# Altium PCB PCB1.PcbDoc
Units mil, origin at the board's own origin, x right, y up, seen from the top; angles counter-clockwise.
Board outline 2755.91 x 2755.91 mil, 2 copper layers (Top Layer, Bottom Layer); 53 components, 58 nets, 251 pads, 55 vias.
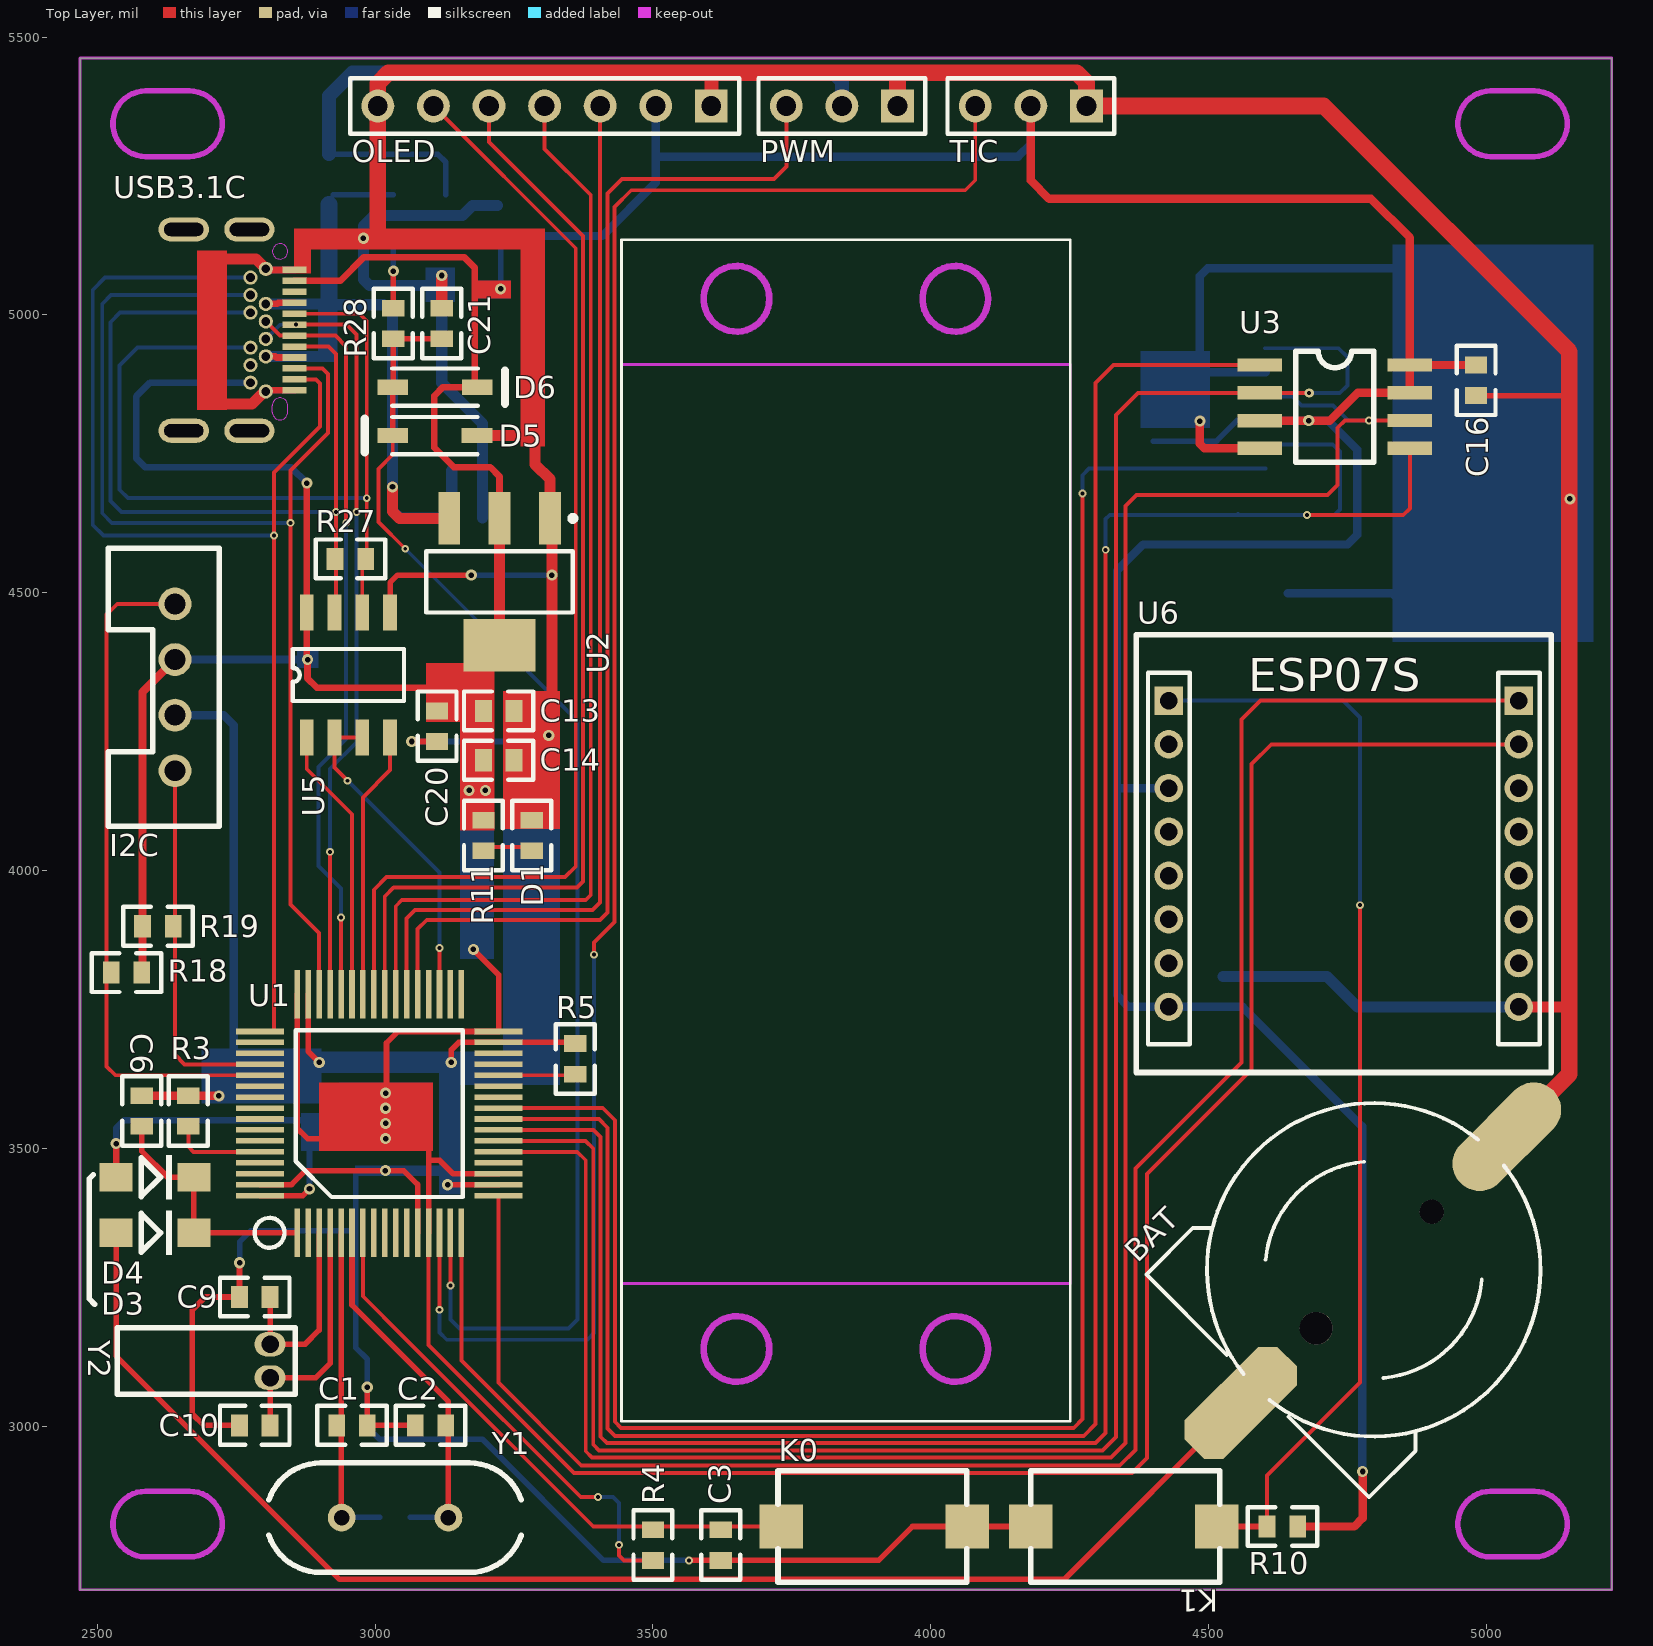
[diagram p0: Top Layer view]
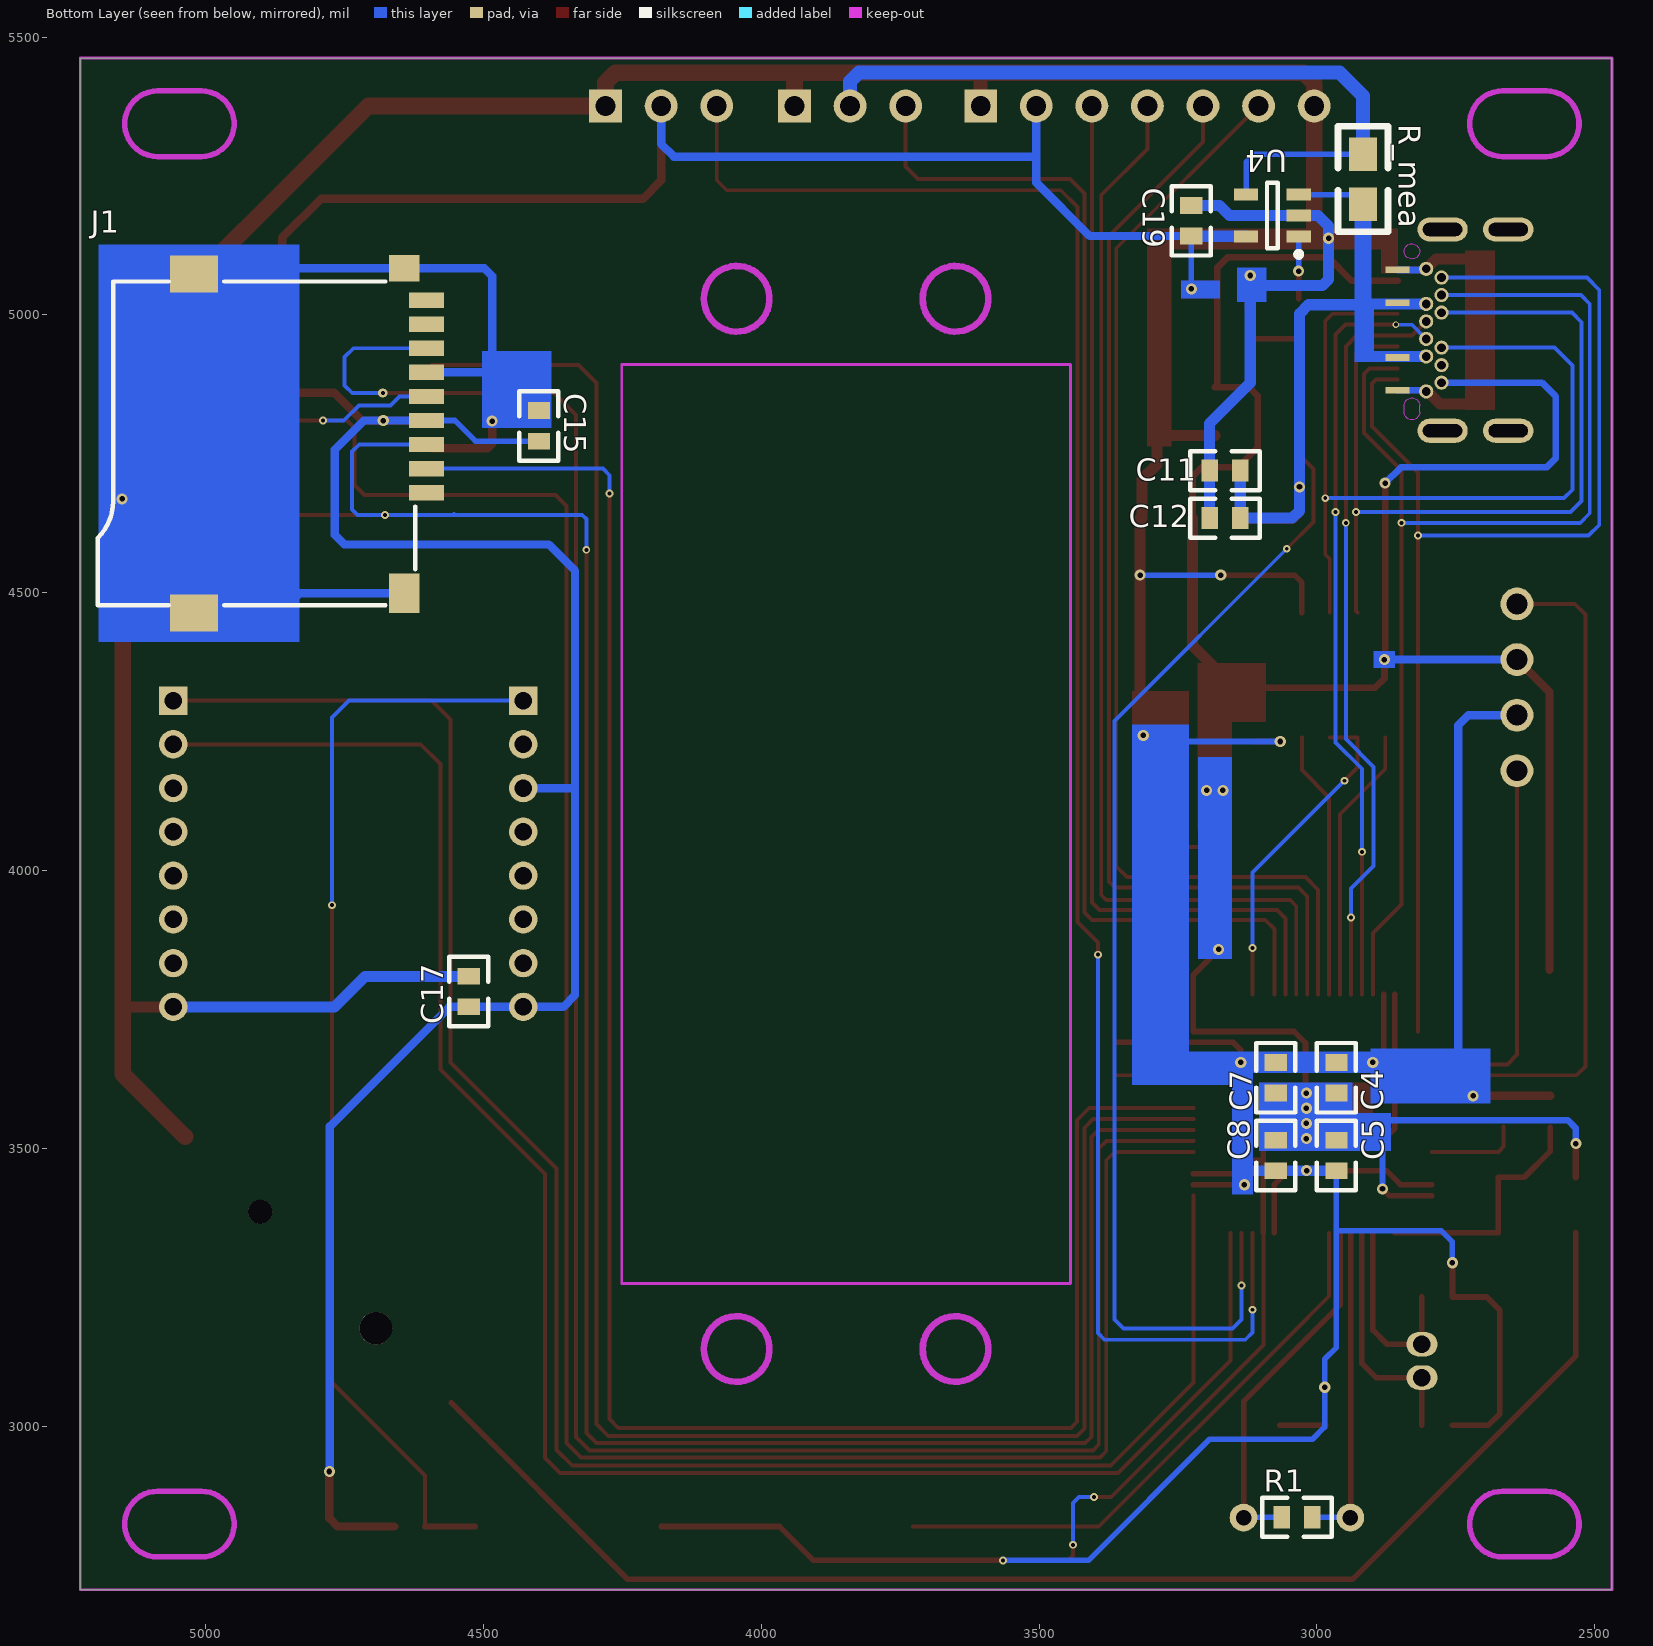
[diagram p1: Bottom Layer view, seen from below]

## Layer stack, top to bottom
Top Layer: signal copper 1.4
Dielectric: dielectric 12.6, FR-4, Dk 4.8
Bottom Layer: signal copper 1.4

## Board outline
2469.21,2706.32 2469.21,5462.23 5225.12,5462.23 5225.12,2706.32

## Design rules (kind name [scope] priority, off if disabled: settings)
Clearance [All] p1: gap=5.9
ComponentClearance [All] p1: gap=0 collisioncheckmode=3 verticalgap=0 showdistances=FALSE
HoleToHoleClearance [All] p1: gap=0 allowstackedmicrovias=TRUE
MinimumSolderMaskSliver [All] p1: minsoldermaskwidth=0
PolygonConnect [All] p1: connectstyle=Relief reliefconductorwidth=10 reliefentries=4 polygonreliefangle="90 Angle"
RoutingVias [All] p1: holewidth=10 width=20 viastyle="Through Hole" minholewidth=6 minwidth=6 maxholewidth=30 maxwidth=50
SilkToSilkClearance [All] p1: silktosilkclearance=0
SilkscreenOverComponentPads [All] p1: minsilkscreentomaskgap=0
SolderMaskExpansion [All] p1: expansion=4
TestPointUsage [All] p1: valid=0 allowmultiple=FALSE
Testpoint [All] p1: side=15 testpointundercomponent=TRUE minsize=40 maxsize=100 preferedsize=60 minholesize=0 maxholesize=40 preferedholesize=32 testpointgrid=1 style=1023 order=0123456789
Width [All] p1: maxlimit=100 minlimit=1 preferedwidth=10
19 further rules are at their usual default settings.

## Components (designator, comment, footprint, x,y, rotation, side; value= is the part's Value field where it differs from the comment)
BAT "CR1220" BATM 4797,3282 r315 top
C1 "Cap" 0603 2986,3002 r180 top
C2 "Cap" 0603 3127,3002 r180 top
C3 "Cap" 0603 3621.8,2759 r90 top
C4 "Cap" 0603 2965,3600 r90 bottom
C5 "Cap" 0603 2965,3515 r270 bottom
C6 "Cap" 0603 2580,3540 r90 top
C7 "Cap" 0603 3074,3600 r90 bottom
C8 "Cap" 0603 3074,3515 r270 bottom
C9 "Cap" 0603 2811,3233 r180 top
C10 "Cap" 0603 2756,3002 r0 top
C11 "Cap" 0603 3193,4720 r180 bottom
C12 "Cap" 0603 3193,4634.5 r180 bottom
C13 "Cap" 0603 3250,4287.5 r180 top
C14 "Cap" 0603 3250,4199 r180 top
C15 "Cap" 0603 4400,4828 r270 bottom
C16 "Cap" 0603 4981,4855 r90 top
C17 "Cap" 0603 4526,3810 r270 bottom
C19 "Cap" 0603 3226,5197 r270 bottom
C20 "Cap" 0603 3111.5,4232.5 r90 top
C21 "Cap" 0603 3120,4957 r90 top
D1 "LED2" 0603 3282,4036 r90 top
D3 "1N4148" DIODE_SOP 2534,3348.5 r0 top
D4 "1N4148" DIODE_SOP 2534,3448.5 r0 top
D5 "SS14" IN5819 3107.55,4783 r180 top
D6 "SS14" IN5819 3107.8,4870.2 r0 top
I2C "Header 4" 4P 2640,4480 r270 top
J1 "SDCARD-M" SDCARD-M 5036,4768.8 r0 bottom
K0 "K1" sop2 4085,2820 r180 top
K1 "K3" sop2 4160,2820 r0 top
OLED "Header 7" HDR1X7 3605,5376 r180 top
PWM "Header 3" HDR1X3 3940,5376 r180 top
R1 "Res2" 0603 3063.5,2836.5 r180 bottom
R3 "Res2" 0603 2664,3540 r90 top
R4 "Res2" 0603 3500,2759 r90 top
R5 "Res2" 0603 3360,3689 r270 top
R10 "Res2" 0603 4660,2820 r180 top
R11 "Res2" 0603 3195,4036 r90 top
R18 "Res2" 0603 2580,3816.8 r180 top
R19 "Res2" 0603 2636.6,3900 r180 top
R27 "Res2" 0603 2928,4561 r0 top
R28 "Res2" 0603 3032.8,4957 r90 top
R_mea "Res2" 0805 2917,5289.5 r270 bottom
TIC "Header 3" HDR1X3 4280,5376 r180 top
U1 "STM32F103RCT6" LQFP64 2860,3348.5 r90 top
U2 "LM1117" MP04A_N 3224,4520 r270 top
U3 "W25Q64" SOIC-8 4592,4910 r0 top
U4 "ina194" ina194 3080,5179 r0 bottom
U5 "SP3485" SOP-8 2877,4240 r90 top
U6 "esp07s" ESP07S 4496,3333 r0 top
USB3.1C "USB3.1 TYPEC" "MicroUSB TypeC 3.1 - duplicate" 2829,5081 r270 top
Y1 "8MHz" XTAL_US 3132,2836 r180 top
Y2 "32.768k" XTAL32768 2811,3148 r270 top

## Footprints (in the part's own frame and the unit in brackets; to place one, negate y for a bottom-side part, rotate by r counter-clockwise, add the part's x,y. Pads: shape width x height; smd on the part's side, far side on the other; paste and mask are expansions set on the pad)
4P [mm]
  round 1.5 hole 0.95: 1(0,0) 2(2.54,0) 3(5.08,0) 4(7.62,0)
  silkscreen extent -2.54,-3.05 10.16,2.03
0603 [mil]
  rect 30x40 smd: 1(0,0) 2(55,0)
  silkscreen extent -35,-35 90,35
0805 [mil]
  rect 60x50 smd: 1(0,-0.06) 2(90,-0.06)
  silkscreen extent -50,-45 140,45
BATM [mm]
  round 1.1 hole 1.1 unplated: 0(0,3.748)
  round 1.5 hole 1.5 unplated: 0(0.025,-3.752)
  oct 2.5x6 smd: 1(0,-8.602)
  oval 2.5x6 smd: 2(0,8.598)
  silkscreen extent -7.62,-7.58 7.62,7.57
DIODE_SOP [mm]
  rect 1.5x1.3 smd: 1(0,0) 2(3.556,0)
  silkscreen extent 1.14,-1.02 2.56,1.02
ESP07S [mm]
  rect 1.3x1.3 hole 0.8: 1(-1.725,24.719) 16(14.275,24.719)
  round 1.3 hole 0.8: 2(-1.725,22.719) 3(-1.725,20.719) 4(-1.725,18.719) 5(-1.725,16.719) 6(-1.725,14.719) 7(-1.725,12.719) 8(-1.725,10.719) 9(14.275,10.719) 10(14.275,12.719) 11(14.275,14.719) 12(14.275,16.719) 13(14.275,18.719) 14(14.275,20.719) 15(14.275,22.719)
  silkscreen extent -3.21,7.72 15.76,27.72
HDR1X3 [mm] "Connector; Header; 3 Position"
  rect 1.5x1.5 hole 0.9: 1(0,0)
  round 1.5 hole 0.9: 2(2.54,0) 3(5.08,0)
  silkscreen extent -1.27,-1.27 6.35,1.27
HDR1X7 [mm] "Connector; Header; 7 Position"
  rect 1.5x1.5 hole 0.9: 1(0,0)
  round 1.5 hole 0.9: 2(2.54,0) 3(5.08,0) 4(7.62,0) 5(10.16,0) 6(12.7,0) 7(15.24,0)
  silkscreen extent -1.27,-1.27 16.51,1.27
IN5819 [mm] "SBD"
  rect 1.4x0.7 smd: 1(-1.925,0) 2(1.925,0)
  silkscreen extent -1.95,-0.85 3.2,0.85, body extent -1.92,-0.85 1.92,0.85, height 1.1
ina194 [mm] "SOT23, 5-Leads, Body 3.0x3.0mm (max), Pitch 0.95mm, IPC Medium Density"
  rect 1.1x0.55 smd: 1(-1.2,0.95) 2(-1.2,0) 3(-1.2,-0.95) 4(1.2,-0.95) 5(1.2,0.95)
  silkscreen extent -1.32,-1.5 0.25,1.9, body extent -0.87,-1.52 0.87,1.53, height 1.45
LQFP64 [mm]
  rect 2.2x0.254 smd: 1(0,0) 2(0,-0.5) 3(0,-1) 4(0,-1.5) 5(0,-2) 6(0,-2.5) 7(0,-3) 8(0,-3.5) 9(0,-4) 10(0,-4.5) 11(0,-5) 12(0,-5.5) 13(0,-6) 14(0,-6.5) 15(0,-7) 16(0,-7.5) 33(10.9,-7.5) 34(10.9,-7) 35(10.9,-6.5) 36(10.9,-6) 37(10.9,-5.5) 38(10.9,-5) 39(10.9,-4.5) 40(10.9,-4) 41(10.9,-3.5) 42(10.9,-3) 43(10.9,-2.5) 44(10.9,-2) 45(10.9,-1.5) 46(10.9,-1) 47(10.9,-0.5) 48(10.9,0)
  rect 0.254x2.2 smd: 17(1.7,-9.2) 18(2.2,-9.2) 19(2.7,-9.2) 20(3.2,-9.2) 21(3.7,-9.2) 22(4.2,-9.2) 23(4.7,-9.2) 24(5.2,-9.2) 25(5.7,-9.2) 26(6.2,-9.2) 27(6.7,-9.2) 28(7.2,-9.2) 29(7.7,-9.2) 30(8.2,-9.2) 31(8.7,-9.2) 32(9.2,-9.2) 49(9.2,1.7) 50(8.7,1.7) 51(8.2,1.7) 52(7.7,1.7) 53(7.2,1.7) 54(6.7,1.7) 55(6.2,1.7) 56(5.7,1.7) 57(5.2,1.7) 58(4.7,1.7) 59(4.2,1.7) 60(3.7,1.7) 61(3.2,1.7) 62(2.7,1.7) 63(2.2,1.7) 64(1.7,1.7)
  silkscreen extent -0.68,-7.56 9.26,1.95
"MicroUSB TypeC 3.1 - duplicate" [mm]
  rect 0.3x1.1 smd far side: 1(0,0.66) 4(1.5,0.66) 9(4,0.66) 12(5.5,0.66)
  rect 0.3x1.1 smd: 1(0,0.66) 2(0.5,0.66) 3(1,0.66) 4(1.5,0.66) 5(2,0.66) 6(2.5,0.66) 7(3,0.66) 8(3.5,0.66) 9(4,0.66) 10(4.5,0.66) 11(5,0.66) 12(5.5,0.66)
  round 0.65 hole 0.4: 13(-0.05,-0.65) 14(0.35,-1.35) 15(1.15,-1.35) 16(1.55,-0.65) 17(1.95,-1.35) 18(2.35,-0.65) 19(3.15,-0.65) 20(3.55,-1.35) 21(3.95,-0.65) 22(4.35,-1.35) 23(5.15,-1.35) 24(5.55,-0.65)
  oval 1.1x2.3 hole 0.6 slot 1.8 at 90 deg: ""(-1.85,-1.4) ""(-1.85,-4.4) ""(7.35,-1.4) ""(7.35,-4.4)
  Keep-Out Layer circle w0.05: c-0.85,0 r0.35
  Keep-Out Layer lines w0.05: 6.5,-0.35 ccw(c6.5,0) 6.5,0.35 6.2,0.35 ccw(c6.2,0) 6.2,-0.35 6.5,-0.35
MP04A_N [mm]
  rect 2.4x1 smd: 1(-2.894,2.3) 2(-2.894,0) 3(-2.894,-2.3)
  rect 2.4x3.3 smd: 4(2.906,0)
  silkscreen extent -3.02,-3.35 1.41,3.48
SDCARD-M [mm] "TF卡"
  rect 1.6x0.7 smd: 1(-11.008,2.25) 2(-11.008,1.15) 3(-11.008,0.05) 4(-11.008,-1.05) 5(-11.008,-2.15) 6(-11.008,-3.25) 7(-11.008,-4.35) 8(-11.008,-5.45) 9(-11.008,-6.55)
  rect 1.4x1.2 smd: 10(-10,-8.004)
  rect 2.2x1.7 smd: 11(-0.4,-7.75) 13(-0.4,7.75)
  rect 1.4x1.8 smd: 12(-10,6.85)
  silkscreen extent -10.5,-7.4 4,7.4
SOIC-8 [mil]
  rect 80x24 smd: 1(0,0) 2(0,-50.06) 3(0,-100.06) 4(0,-150.06) 5(270,-150) 6(270,-100) 7(270,-50) 8(270,0)
  silkscreen extent 65,-175 205,25
sop2 [mm]
  rect 2x2 smd: 1(0.5,0) 2(9,0)
  silkscreen extent 0.51,-2.54 9.14,2.54
SOP-8 [mil]
  rect 65x25 smd: 1(0,0) 2(0,-50) 3(0,-100) 4(0,-150) 5(224.41,-150) 6(224.41,-100) 7(224.41,-50) 8(224.41,0)
  silkscreen extent 65,-175 159,25
XTAL32768 [mil]
  oval 44.09x55.9 hole 31.49: 1(0,0) 2(60,0)
  silkscreen extent -30,-275 90,45
XTAL_US [mil]
  round 50 hole 28: 1(0,0) 2(192.13,0)
  silkscreen extent -131,-98 323,98

## Part data
BAT: library part BAT
C1 C2 C3 C4 C5 C6 C7 C8 C9 C10 C11 C12 C13 C14 C15 C16 C17 C19 C20 C21: "Capacitor"
D1: "Typical RED, GREEN, YELLOW, AMBER GaAs LED"
D3 D4: library part D
D5 D6: library part "Diode 1N4007", "1 Amp General Purpose Rectifier"
I2C: "Header, 4-Pin"
J1: "TF卡槽"
K0 K1: library part KEY
OLED: "Header, 7-Pin"
PWM TIC: "Header, 3-Pin"
R1 R3 R4 R5 R10 R11 R18 R19 R27 R28 R_mea: "Resistor"
U1: library part STM32F103RBT6, "STM32 ARM-based 32-bit MCU with 128 Kbytes Flash, 64-pin LQFP, Industrial Temperature"
U2: "800mA LDO"
U3: library part W25X16, "W25X16;SST25VF016;MX25L1605"
U5: library part MAX3485
USB3.1C: library part "USB3.1 TYPEc"
Y1 Y2: library part XTAL, "Crystal Oscillator"

## Via types
v1: diameter 20, hole 10, Top Layer to Bottom Layer, 31 vias
v2: diameter 14, hole 7, Top Layer to Bottom Layer, 22 vias
v3: diameter 17, hole 7, Top Layer to Bottom Layer, 1 vias
v4: diameter 11.81, hole 7.09, Top Layer to Bottom Layer, 1 vias

## Nets (pads, with @x,y where several pads share a name; then routed paths per layer and width w, separated by ;. In a path a pad name is that pad's centre, name@x,y a point inside that pad or via, vN(x,y) a via of type N, cw(c..) or ccw(c..) an arc to the next point about the centre after c; other vN are vias at no path point)
AN8: U1.26
AN9: U1.27
AN10: U1.8
AN11: U1.9
AN12: U1.10
AN13: U1.11
D+: U1.45 USB3.1C.6 USB3.1C.19 | length 1409.6
  Top Layer w7: USB3.1C.6 2948.93,4982.57 2966.5,4965 v2(2966.5,4645.5) ; U1.45 v2@2919.06,4034
  Bottom Layer w7: USB3.1C.19@2810.98,4956.98 USB3.1C.19 2828.93,4982.5 2847.5,4982.5 ; 2836.5,4982.5 2847.5,4982.5 ; v4(2858,4982.5) 2847.5,4982.5 ; v2(2919,4034) 2919,4183.5 2966.5,4231 v2(2966.5,4645.5)
D-: U1.44 USB3.1C.7 USB3.1C.18 | length 1366.7
  Top Layer w7: USB3.1C.18 2803.52,4988.48 2829.11,4962.89 USB3.1C.7 2928.61,4962.89 2948,4943.5 v2(2948,4626) ; U1.44 v2@2938.74,3916
  Bottom Layer w7: v2(2938.8,3916) 2938.8,3967.7 2898,4008.5 2898,4187 2948,4237 v2(2948,4626)
F_CS: U1.24 U3.1 | length 3851.2
  Top Layer w7: U1.24 3402.78,3553.22 3418.5,3537.5 3418.5,2996.5 3431.9,2983.1 4275.1,2983.1 4296.5,3004.5 4296.5,3760 ; 4296.5,3777.5 4296.5,3760 ; 4296.5,4609 4296.5,3760 ; 4296.5,4616.5 4296.5,4605 4296.5,4877.5 4329,4910 U3.1
GND: BAT.2 C1.1 C2.2 C3.1 C4.2 C5.2 C6.2 C7.2 C8.2 C9.2 C10.1 C11.1 C12.1 C13.1 C14.1 C15.1 C16.1 C17.1 C19.1 C20.1 C21.2 D1.2 D5.1 I2C.3 J1.6 J1.10 J1.11 J1.12 J1.13 K0.1 K1.1 OLED.1 OLED.7 PWM.1 R3.2 R5.1 TIC.1 U1.12 U1.18 U1.31 U1.47 U1.63 U2.1 U3.4 U4.2 U5.5 U6.9 USB3.1C.1 USB3.1C.12 USB3.1C.13 USB3.1C.24 | length 14949.7
  Top Layer w10: C10.1 2691.8,3002 2671,3022.8 2671,3209.6 2694.4,3233 C9.2 v1@2756,3294.4 ; U1.63 2849.61,3435.11 2875,3460.5 v1(3018.5,3460.5) 3051.5,3460.5 3076.54,3435.46 U1.12 ; U1.47 2879.68,3674.82 v1(2899.5,3655) ; C1.1@2984,3002 C1.1 ; v1(2986,3070.5) C1.1 ; 3002.5,5137.5 3005,5140 ; U5.5 3027,4518.5 3040.5,4532 v1(3173,4532) ; v1(3066,4232.5) C20.1 ; C2.2@3067,3002 C1.1 ; v1@3130.5,3435.11 U1.18 ; v1(3137,3655) 3137,3677.5 3150.52,3691.02 U1.31 R5.1@3361.5,3691.02 ; v2(3565,2759) C3.1 ; C3.1@3622,2759 3906,2759 3967,2820 K1.1 ; C16.1 5145,4855 5149,4859 ; 5148.01,3755.01 5149,3756
  Top Layer w12: USB3.1C.24 2805.38,4864.46 USB3.1C.12@2854.98,4864.46 ; USB3.1C.13@2805.38,5081 USB3.1C.1@2854.98,5081
  Top Layer w15: C6.2 R3.2 v1(2719,3595) ; v1(4484,4809) 4484,4768 4492.06,4759.94 U3.4
  Top Layer w20: 2716,4840 2778.19,4840 2800.68,4862.5 USB3.1C.24 ; 2716,5101 2785.38,5101 USB3.1C.13 USB3.1C.13@2805.38,5081 ; C21.2 v1(3120,5071) ; D5.1 3276.5,4783 ; C14.1@3250,4195 3311.05,4195 ; C13.1 3307.05,4287.5 ; D1.2@3282,4098 3314.55,4130.55 ; 3288,4780 3288,4731 3314.55,4704.45 U2.1 ; v1@3318.05,4243.6 U2.1@3318.05,4633.95 ; U6.9 5148.01,3755.01
  Top Layer w25: OLED.1@3605,5393 3605,5432.5
  Top Layer w30: 3005,5136 3005,5140 OLED.7 3005,5417 3024,5436 4262,5436 4280,5418 TIC.1 4707,5376 5149,4934 5149,4859 5149,4748 ; PWM.1 3940,5430 ; BAT.2 5149,3634 5149,3672 ; 5149,3649 5149,3672 ; 5149,4779 5149,4748 ; 5149,3672 5149,3756 5149,4748
  Bottom Layer w10: v1(2719,3595) 2743,3595 2765,3595 2824,3654 2878.5,3654 ; v1(2756.2,3294.6) 2756.2,3332.2 2776,3352 2965,3352 ; 2965,3400.6 2965,3352 ; C5.2 2965,3352 ; v1(3066,4232.5) 3271.5,4232.5 3275.5,4228.5 ; v1(3173,4532) v1(3318,4532) ; v2(3565,2759) 3411,2759 3193,2977 3008,2977 2986,2999 v1(2986,3070.5) 2986,3121 2965,3142 2965,3352 ; C17.1 4624,3810
  Bottom Layer w12: USB3.1C.24 2805.38,4864.46 USB3.1C.12@2854.98,4864.46 ; USB3.1C.13 2805.38,5081 USB3.1C.1@2854.98,5081
  Bottom Layer w15: I2C.3 2727.5,4280 2746,4261.5 2746,3598 2743,3595 ; v1@4484,4808 v1(4484,4809) 4484,4920 4484,5070 4497.92,5083.92 J1.10 4901.08,5083.92 4911.08,5073.92 J1.11 5086.28,5073.92 5150,5010.2 v1(5150,4669) 5150,4488 5125.68,4463.68 J1.13 4866.32,4463.68 4830.89,4499.11 J1.12 ; 4486,4896.75 J1.6
  Bottom Layer w20: 3120,5049 3120,4878 3193,4805 C12.1 ; v1(3120,5071) 3101.9,5052.9 2990.1,5052.9 2979,5064 v1(2979,5138) 2979,5160 2998,5179 U4.2 3157,5179 3175,5197 C19.1@3220,5197 ; C17.1 4713,3810 4767.99,3755.01 U6.9
  other v1: 3130.5,3435 3312.6,4243.6
I2C_SCL: I2C.4 R19.1 U1.52 | length 671.3
  Top Layer w7: I2C.4 2640,3669 2657.35,3651.65 U1.52
I2C_SDA: I2C.1 R18.2 U1.53 | length 1227.3
  Top Layer w7: I2C.1@2640.5,4480.5 I2C.1 2536,4480 2517,4461 2517,3648 2533.03,3631.97 U1.53
I_AD: C21.1 D5.2 D6.1 R28.1 U1.15 | length 2407.2
  Top Layer w7: D5.2 3031.77,4748.77 3006,4723 3006,4627.6 v2(3054.2,4579.4) ; v2@3135.59,3253.41 U1.15
  Top Layer w10: D5.2@3032.01,4784.4 D6.1 3032.8,4870.99 R28.1 C21.1@3119,4957 ; v2(3054.2,4579.4) v2@3054.4,4579.2
  Bottom Layer w7: v2(3054.2,4579.4) 3364.2,4269.4 3364.2,3192.4 3348,3176.2 3152,3176.2 3135.6,3192.6 v2(3135.6,3253.6)
I_MEA: R28.2 U4.1 | length 112
  Top Layer w10: 3032.8,5029 v1@3032.8,5079
  Bottom Layer w10: v1@3032.76,5079 U4.1@3032.76,5141
  other v1: 3032.8,5078.8
JNTRST: U1.56
JTCK/SWCLK: U1.49 USB3.1C.11 USB3.1C.14 | length 2299.3
  Top Layer w7: U1.49@2818,3711 2818,4716.6 2901,4799.6 2901,4877 2893.85,4884.15 USB3.1C.11
  Bottom Layer w7: USB3.1C.14 2514.22,5067.22 2492,5045 2492,4622 2511,4603 v2(2818,4603)
JTDO: U1.55
JTMS/SWDIO: U1.46 USB3.1C.10 USB3.1C.15 | length 2237.8
  Top Layer w7: USB3.1C.10 2905.17,4903.83 2915,4894 2915,4787.4 2848,4720.4 2848,3939 2899.37,3887.63 U1.46
  Bottom Layer w7: 2728,5035.72 2740,5035.72 ; USB3.1C.15 2740,5035.72 ; v2(2848,4626) 2526.2,4626 2509,4643.2 2509,5020 2524.72,5035.72 2740,5035.72
NetBAT_1: BAT.1 D3.1 | length 2552.1
  Top Layer w10: D3.1 2534,3127 2936,2725 4216,2725 ; 4225,2725 4216,2725 ; BAT.1 4240,2725 4216,2725
NetC1_2: C1.2 R1.2 U1.5 Y1.2 | length 581.8
  Top Layer w10: U1.5 2938.74,2837.13 Y1.2
  Bottom Layer w10: Y1.2 2940.37,2836.5 R1.2
NetC2_1: C2.1 R1.1 U1.6 Y1.1 | length 653.1
  Top Layer w10: U1.6 2958.42,3218.58 3132,3045 Y1.1
  Bottom Layer w10: R1.1 3131.5,2836.5 Y1.1
NetC6_1: C6.1 D3.2 D4.2 U1.1 | length 441.9
  Top Layer w10: C6.1@2580.3,3538 2580.3,3495.1 2626.9,3448.5 D4.2 D3.2 U1.1
NetC9_1: C9.1 U1.3 Y2.1 | length 359
  Top Layer w10: C9.1 Y2.1 2874,3148 2899.37,3173.37 U1.3
NetC10_2: C10.2 U1.4 Y2.2 | length 440.2
  Top Layer w10: C10.2 Y2.2 2893.5,3088 2919.05,3113.55 U1.4 ; U1.4@2919.05,3320 U1.4@2919.5,3319.55
NetD1_1: D1.1 R11.1 | length 82
  Top Layer w7: R11.1@3195,4043 D1.1@3277,4043
NetK1_2: K1.2 R10.2 U6.1 | length 1991.3
  Top Layer w7: R10.2 4605,2887 ; 4605,2906 4605,2887 ; v2(4772,3938) 4772,3079 4605,2912 4605,2887
  Top Layer w10: K1.2 R10.2
  Bottom Layer w7: U6.1 4741.81,4306.19 4772,4276 v2(4772,3938)
NetPWM_2: PWM.2 R_mea.1 U4.4 | length 1400.1
  Bottom Layer w10: R_mea.1 3112.5,5289.5 3127.24,5274.76 U4.4
  Bottom Layer w25: R_mea.1 2917.06,5394.06 2959,5436 3824,5436 3840,5420 PWM.2 ; PWM.2@3840,5363 PWM.2 ; PWM.2@3840,5393 PWM.2
NetR3_1: R3.1 U1.60 | length 169.6
  Top Layer w7: R3.1 2664,3503.5 2673.5,3494 2792.9,3494 U1.60
NetR5_2: R5.2 U1.28 | length 137.8
  Top Layer w7: U1.28 3359.96,3631.96 R5.2@3360,3632
OLED_DC: OLED.6 U1.41 | length 2051
  Top Layer w7: U1.41 2997.79,3965.79 3020.5,3988.5 3342,3988.5 3361,4007.5 3361,5120 OLED.6 ; 3193.5,5287.5 3199,5282
OLED_RST: OLED.5 U1.40 | length 2009.4
  Top Layer w7: U1.40 3017.48,3953.98 3033.5,3970 3363.5,3970 3374,3980.5 3374,5142 3205,5311 OLED.5
OLED_SCL: OLED.3 U1.38 | length 1966.2
  Top Layer w7: U1.38 3056.85,3913.85 3072,3929 3391,3929 ; 3401.5,3939.5 3391,3929 ; OLED.3@3401.5,5389.5 3405,5393 3405,3943 3391,3929
OLED_SDA: OLED.4 U1.39 | length 1972
  Top Layer w7: U1.39 3037.17,3936.17 3048,3947 3379,3947 3388,3956 3388,5216 3305,5299 OLED.4
PB5: U1.57
PB6: U1.58
PB7: U1.59
PB8: U1.61
PB9: U1.62
PC10: U1.51
PD2: U1.54
PWM: PWM.3 U1.37 | length 2232.6
  Top Layer w7: U1.37 3076.53,3895.03 3093,3911.5 3404.5,3911.5 3417.9,3924.9 3417.9,5218.4 3444.5,5245 3717.5,5245 3740,5267.5 PWM.3@3740,5393
RESET: C3.2 K0.2 R4.2 U1.7 | length 1034.6
  Top Layer w7: U1.7 2978.11,3234.39 3051.25,3161.25 3392.5,2820 3453,2820 3547,2820 K0.2@3727,2820
RS485_A: R27.2 U5.6 USB3.1C.5 USB3.1C.20 | length 1634.9
  Top Layer w7: USB3.1C.5 2896.6,5002.26 ; 2919.2,5002.26 2896.6,5002.26 ; U5.6 2977,4561 2985,4569 v2(2985,4670.4) 2985,4989 2971.74,5002.26 2896.6,5002.26
  Bottom Layer w7: 2717,4941.24 2742,4941.24 ; USB3.1C.20 2742,4941.24 ; v2(2985,4670.4) 2555.2,4670.4 2540,4685.6 2540,4909 2572.24,4941.24 2742,4941.24
RS485_B: R27.1 U5.7 USB3.1C.8 USB3.1C.17 | length 1558.8
  Top Layer w7: USB3.1C.8 2916.3,4943.2 2929.7,4929.8 v2(2929.7,4645.5) 2929.7,4467.11 U5.7
  Bottom Layer w7: 2723,5004.23 2740,5004.23 ; USB3.1C.17 2740,5004.23 ; v2@2929.4,4645.2 v2@2929.6,4645.4 ; v2(2929.7,4645.5) 2543.5,4645.5 2524,4665 2524,4987 2541.23,5004.23 2740,5004.23
RS485_RE: U1.35 U5.2 U5.3 | length 590.7
  Top Layer w7: v2(2950.5,4162) 2927,4185.5 U5.2 U5.3 ; U1.35 3115.91,3860.91 v2(3116,3861)
  Bottom Layer w7: v2(2950.5,4162) 3116,3996.5 v2(3116,3861)
RS485_RX: U1.43 U5.1 | length 496.1
  Top Layer w7: U5.1 2877,4183 2958.42,4101.58 U1.43
RS485_TX: U1.42 U5.4 | length 488.7
  Top Layer w7: U1.42 2978.11,4126 ; U5.4 3027,4181 2978.11,4132.11 ; 2978.11,4126 2978.11,4132.11 ; 2978.11,4126 2978.11,4132.11
RX2: U1.17 U6.16 | length 3466.9
  Top Layer w7: U1.17 3222.2,3078.8 3371,2930 4252,2930 ; 4257,2930 4252,2930 ; U6.16 4593.19,4306.19 4559,4272 4559,3655 4368,3464 4368,2958 4340,2930 4252,2930
RX3: U1.30
SD_CS: J1.2 U1.25 | length 3646.3
  Top Layer w7: U1.25 3409.59,3572.91 3431.5,3551 3431.5,3008.5 3442.5,2997.5 4257.1,2997.5 4273,3013.4 v2(4273,4679)
  Bottom Layer w7: v2(4273,4679) 4273,4711.6 4284.93,4723.52 J1.2
SPI1_MISO: J1.7 U1.22 U3.2 | length 4194.2
  Top Layer w7: U1.22 3378.65,3513.85 3392.5,3500 3392.5,2967.5 3402.9,2957.1 4309.1,2957.1 4333,2981 4333,3688 ; 4333,3713 4333,3688 ; 4333,4411 4333,3688 ; 4333,4418 4333,4408 4333,4467 ; 4333,4476 4333,4467 ; v3(4680.8,4859.6) 4680.46,4859.94 U3.2 4372.94,4859.94 4333,4820 4333,4467
  Bottom Layer w7: J1.7@4601,4940.06 4733.74,4940.06 4749.6,4924.2 4749.6,4873.4 4735.8,4859.6 v3(4680.8,4859.6)
SPI1_MOSI: J1.3 U1.23 U3.5 | length 4281
  Top Layer w7: U1.23 3392.96,3533.54 3405.5,3521 3405.5,2981.5 3417,2970 4296,2970 4314.5,2988.5 4314.5,3702 ; 4314.5,3719.5 4314.5,3702 ; v2@4314.5,4577 4314.5,3702 ; v2(4677,4640) 4850,4640 4862,4652 U3.5
  Bottom Layer w7: v2(4314.6,4577.4) 4314.6,4632.6 4322,4640 v2(4677,4640) 4726,4640 4736,4650 4736,4754 4723.17,4766.83 J1.3 ; 4553,4641.8 4553.8,4641
SPI1_SCK: J1.5 U1.21 U3.6 | length 4239.5
  Top Layer w7: U1.21 3363.83,3494.17 3379,3479 3379,2955.5 3390.5,2944 4324,2944 4350.5,2970.5 4350.5,3705 ; 4350.5,3713.74 4350.5,3705 ; 4350.5,4384 4350.5,3705 ; 4350.5,4392.5 4350.5,4377 4350.5,4656.5 4370,4676 4714,4676 4732,4694 4732,4797 4745,4810 4777,4810 ; 4768,4810 4777,4810 ; U3.6 4777,4810
  Bottom Layer w7: J1.5 4650.55,4853.45 4667,4837 4724,4837 4751,4810 v2(4788.6,4810)
TIC: TIC.3 U1.14 | length 3327.6
  Top Layer w7: v2@3115.9,3210 U1.14 ; v2(3394,3849) 3394,3871 3430.8,3907.8 3430.8,5194.3 3461,5224.5 4062,5224.5 4080,5242.5 TIC.3@4080,5391.5
  Bottom Layer w7: v2(3116,3210) 3116,3169 3129,3156 3382,3156 3394,3168 v2(3394,3849)
TX2: U1.16 U6.15 | length 3381.1
  Top Layer w7: U1.16 3155.27,3118.73 3357.9,2916.1 4362.1,2916.1 4389,2943 4389,3454 4577,3642 4577,4192 4612.45,4227.45 U6.15
TX3: U1.29
VCC3.3: C4.1 C5.1 C7.1 C8.1 C13.2 C14.2 C15.2 C16.2 C17.2 C19.2 C20.2 D4.1 D6.2 I2C.2 J1.4 OLED.2 R4.1 R10.1 R11.2 R18.1 R19.2 TIC.2 U1.13 U1.19 U1.32 U1.48 U1.64 U2.2 U2.4 U3.3 U3.7 U3.8 U4.5 U5.8 U6.3 U6.8 USB3.1C.2 USB3.1C.23 | length 12697.7
  Top Layer w7: U1.13 3096.22,3146.78 3370,2873 v2(3401,2873) ; v2(3439,2787) 3439,2768 3448,2759 R4.1
  Top Layer w10: R18.1@2580,3820 R18.1@2581.6,3821.6 ; U1.64 2869.93,3415.43 v1(2882,3427.5) ; U1.48 2860,3536.5 2878.5,3518 3020.5,3518 3020.5,3690 3041.2,3710.7 U1.32 3222.2,3812.8 v1@3176.6,3858.4 ; U1.13 3096.22,3478 ; 3096.22,3502.5 3096.22,3478 ; 3179.5,5046 3180.5,5047 v1(3226,5047) ; U1.19 3140.26,3454.8 3116.06,3479 3097.22,3479 3096.22,3478
  Top Layer w12: D4.1 v1(2534,3509) ; USB3.1C.2 2937.32,5061.31 2980,5104 3160,5104 3179.5,5084.5 3179.5,5046 3179.5,4874.29 D6.2 3122.2,4870.2 3106.5,4854.5 3106.5,4761.5 3142,4726 3207.5,4726 3224,4709.5 U2.2 ; U5.8 U5.8@2877.2,4464.61 ; v1@2877.2,4381.3 U5.8@2877.2,4464.61 ; v1(2877.2,4697.6) U5.8@2877.2,4464.61 ; v1(2878.5,4380) 2878.5,4346 2895,4329.5 3112,4329.5
  Top Layer w15: R18.1@2581.6,3821.6 R19.2 2581.6,4321.6 I2C.2 ; R11.2@3195,4098 C13.2 U2.4@3195,4376.6 ; TIC.2 4180,5242 4213,5209 4792,5209 4862,5139 U3.8 ; U3.3 4717.94,4809.94 4768,4860 U3.7 U3.8 ; R10.1 4762,2820 4777,2835 v1(4777,2919) ; C16.2 U3.8
  Top Layer w20: 3164.4,4346 3195,4376.6 U2.4 U2.2
  Bottom Layer w7: v2(3401,2873) 3428,2873 3439,2862 v2(3439,2787)
  Bottom Layer w10: v1(2882,3427.5) 2882,3543.5 2897,3558.5 2967.5,3558.5 ; v1(3226,5047) C19.2 ; C15.2 4514,4773 4551.14,4810.14 J1.4
  Bottom Layer w12: v1(2534,3509) 2534,3536.5 2548.5,3551 2874.5,3551 2882,3543.5 ; USB3.1C.23 2595.24,4878.24 2570,4853 2570,4742.4 2586.6,4725.8 2849,4725.8 v1(2877.2,4697.6)
  Bottom Layer w15: I2C.2 2794.5,4380 ; 2832.5,4380 2794.5,4380 ; v1(2878.5,4380) 2794.5,4380 ; C19.2 3409,5142 3505,5238 OLED.2 ; 3507,5285 4157,5285 4180,5308 TIC.2 ; 4339,4148.71 U6.3 ; J1.4 4679.86,4810.14 v1(4680,4810) 4715,4810 4767,4758 4767,4604 4750,4587 4382,4587 4335,4540 4335,3776 4355.99,3755.01 U6.8 4560.99,3755.01 4776,3540 v1@4776,2917
  Bottom Layer w20: U4.5 C19.2@3219.6,5141.6
  other v1: 3019,3518 3019,3545.33 3019,3572.67 3019,3600 3176.8,3858.4 3169.2,4144.6 3198.4,4144.6
VCC5V: C11.2 C12.2 R_mea.2 U2.3 U4.3 USB3.1C.4 USB3.1C.9 USB3.1C.16 USB3.1C.21 | length 1519.9
  Top Layer w12: USB3.1C.21 2820.51,4925.49 2822.48,4923.52 USB3.1C.9@2854.98,4923.52 ; USB3.1C.16 2823.98,5019.98 2825.94,5021.94 USB3.1C.4@2854.98,5021.94
  Top Layer w20: v1(3031.3,4690.6) 3031.3,4646.7 3044.05,4633.95 U2.3
  Bottom Layer w10: R_mea.2@2924.4,5216.4 U4.3
  Bottom Layer w20: USB3.1C.21 2854.98,4925.49 2916.06,4925.49 ; USB3.1C.16 2854.98,5019.98 2914.02,5019.98 ; 2916.06,5018.5 2917.06,5018.5 3015,5018.5 3031.3,5002.2 v1@3031.3,4691 ; v1(3031.3,4690.6) 3031.3,4647.7 3044.5,4634.5 C12.2 C11.2
  Bottom Layer w30: 2916.06,4941.06 2916.06,5018.5 ; 2917.06,5018.5 R_mea.2
pads on no net: BAT.0 J1.1 J1.8 J1.9 U1.2 U1.20 U1.33 U1.34 U1.36 U1.50 U6.2 U6.4 U6.5 U6.6 U6.7 U6.10 U6.11 U6.12 U6.13 U6.14 USB3.1C. USB3.1C.3 USB3.1C.22

## Keep-outs
Keep-Out Layer:
  circle w11.81: c4044.02,3139.39 r59.06
  circle w11.81: c3650.32,3139.39 r59.06
  circle w11.81: c4044.02,5029.16 r59.06
  circle w11.81: c3650.32,5029.16 r59.06
  lines w5: 2469.21,2706.32 5225.12,2706.32 5225.12,5462.23 2469.21,5462.23 2469.21,2706.32 ; 3443.62,3257.5 3443.62,4911.05 4250.71,4911.05 4250.71,3257.5 3443.62,3257.5
  lines w10: 2587.32,2765.38 cw(c2587.32,2824.43) 2587.32,2883.49 2666.06,2883.49 cw(c2666.06,2824.43) 2666.06,2765.38 2587.32,2765.38 ; 2587.32,5285.06 cw(c2587.32,5344.12) 2587.32,5403.17 2666.06,5403.17 cw(c2666.06,5344.12) 2666.06,5285.06 2587.32,5285.06 ; 5007.37,2765.38 cw(c5007.37,2824.43) 5007.37,2883.49 5086.11,2883.49 cw(c5086.11,2824.43) 5086.11,2765.38 5007.37,2765.38 ; 5007.37,5285.06 cw(c5007.37,5344.12) 5007.37,5403.17 5086.11,5403.17 cw(c5086.11,5344.12) 5086.11,5285.06 5007.37,5285.06

## Other copper
Top Layer:
  rectangle net GND: 2680,4829 2734,5116
  rectangle net GND: 3262,4763 3306,5156
  rectangle net GND: 2854,5118 3300,5156
  rectangle net GND: 2854,5075 2885,5150
  rectangle net GND: 3230.5,4075.5 3333,4323
  rectangle net VCC3.3: 2899,3496 3104,3618.5
  rectangle net VCC3.3: 3091.2,4267.5 3215,4373.5
  rectangle net VCC3.3: 3177,5030 3245,5062
  rectangle net VCC3.3: 3153,4072.2 3215,4295.4
  pour cut-out: 2787.5,2955.5 2785,2708.5 2471.5,2708.5 2471.5,2954
  pour cut-out: 5225.25,2955.5 5222.75,2708.5 4909.25,2708.5 4909.25,2954
  pour cut-out: 2787.25,5462 2784.75,5215 2471.25,5215 2471.25,5460.5
  pour cut-out: 5225.5,5462 5223,5215 4909.5,5215 4909.5,5460.5
  pour cut-out: 2595,5190 2595,4760 2885,4760 2885,5190
Bottom Layer:
  rectangle net GND: 4831,4412 5192,5127
  rectangle net GND: 4377,4797 4502,4935
  rectangle net VCC5V: 2897,4915.5 2932,5030
  rectangle net VCC3.3: 2936,3496 3104,3619
  rectangle net GND: 2963.5,3451 3119.5,3470
  rectangle net GND: 2874.5,3636 3125,3675
  rectangle net GND: 3115,3417 3153,3675
  rectangle net GND: 3091,5023 3144,5085
  rectangle net VCC3.3: 3174,5030 3245,5062
  rectangle net GND: 3230.6,3614.8 3332.8,4262.8
  rectangle net GND: 3149.2,3614.8 3243.4,3675
  rectangle net VCC3.3: 3153,3841.2 3214,4205
  rectangle net VCC3.3: 2859.5,4365 2898,4395.5
  rectangle net GND: 2688,3581 2904,3680
  rectangle net VCC3.3: 2867,3496 2948.5,3564
  pour cut-out: 2787.5,2955.5 2785,2708.5 2471.5,2708.5 2471.5,2954
  pour cut-out: 5225.5,5462 5223,5215 4909.5,5215 4909.5,5460.5
  pour cut-out: 2787.25,5462 2784.75,5215 2471.25,5215 2471.25,5460.5
  pour cut-out: 5225.25,2955.5 5222.75,2708.5 4909.25,2708.5 4909.25,2954
  pour cut-out: 2595,5190 2595,4760 2885,4760 2885,5190

## Silkscreen, mask and mechanical layers (free items; w line width, h text height)
Top Overlay:
  lines w5: 3443.62,3009.47 3443.62,5135.46 4250.71,5135.46 4250.71,3009.47 3443.62,3009.47
  lines w10: 2485.4,3445.6 2493,3453.2 ; 2485.4,3445.8 2485.4,3230 2495.4,3220

## Text inside footprints (layer, text, board x,y; h text height)
U6: Top Overlay "ESP07S" at 4571,4323 h60